# Altium PCB BEE_PC_ADT_V100.PcbDoc
Units mm, origin at the board's own origin, x right, y up, seen from the top; angles counter-clockwise.
Board outline 188 x 90 mm, 4 copper layers (L1_SHIELD, L2_GND, L3_POWER, L4_SHIELD), stack 1.584 mm thick; 22 components, 12 nets, 84 pads, 0 vias.
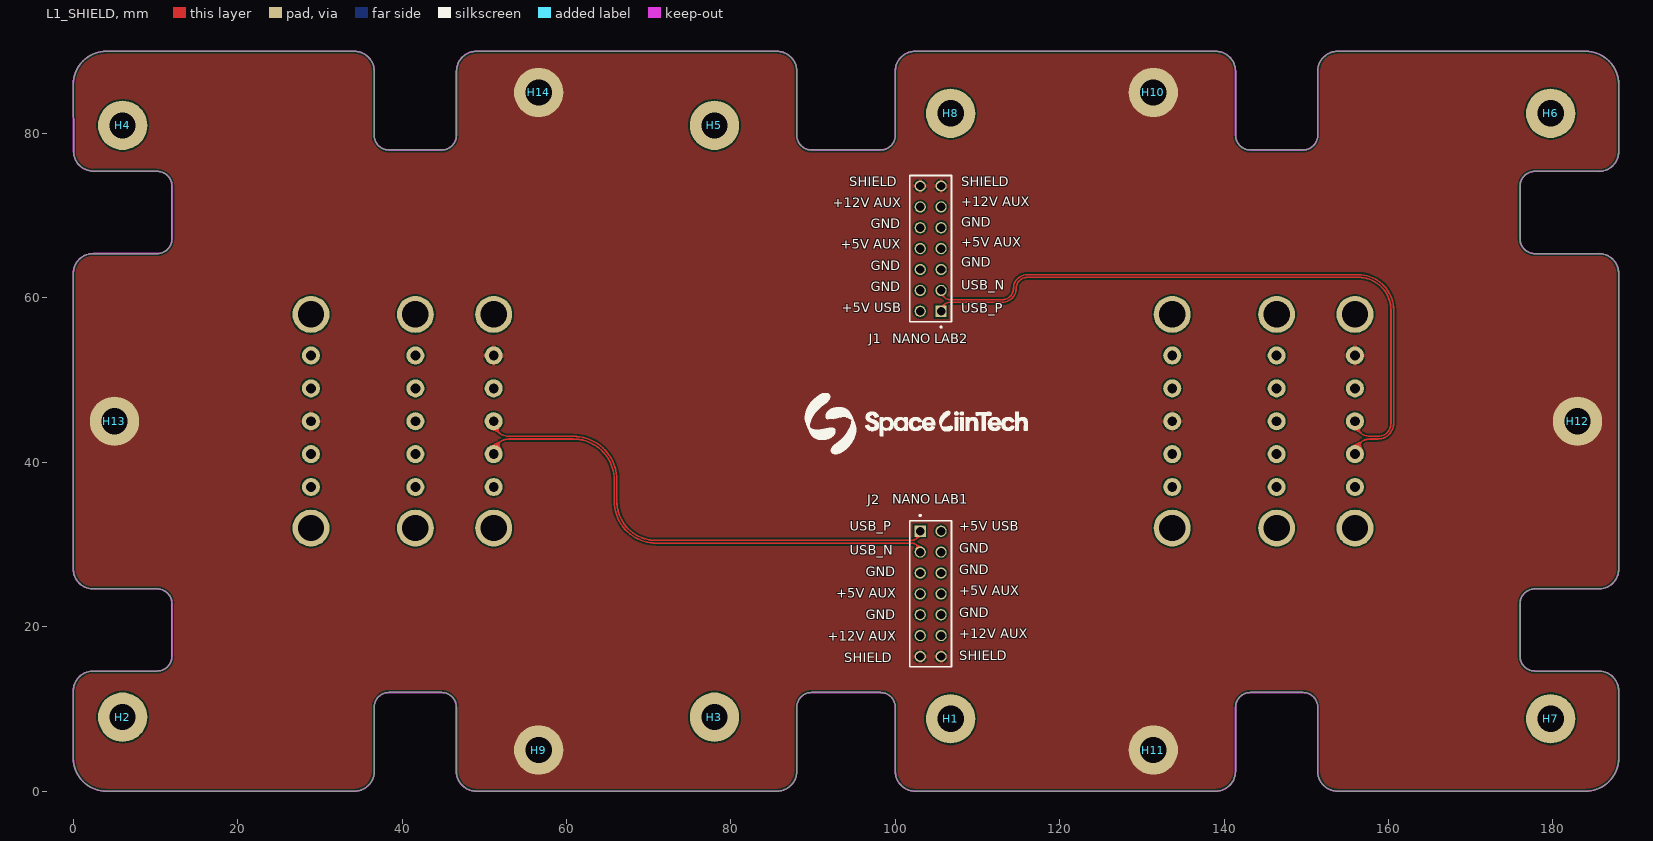
[diagram p0: L1_SHIELD view]
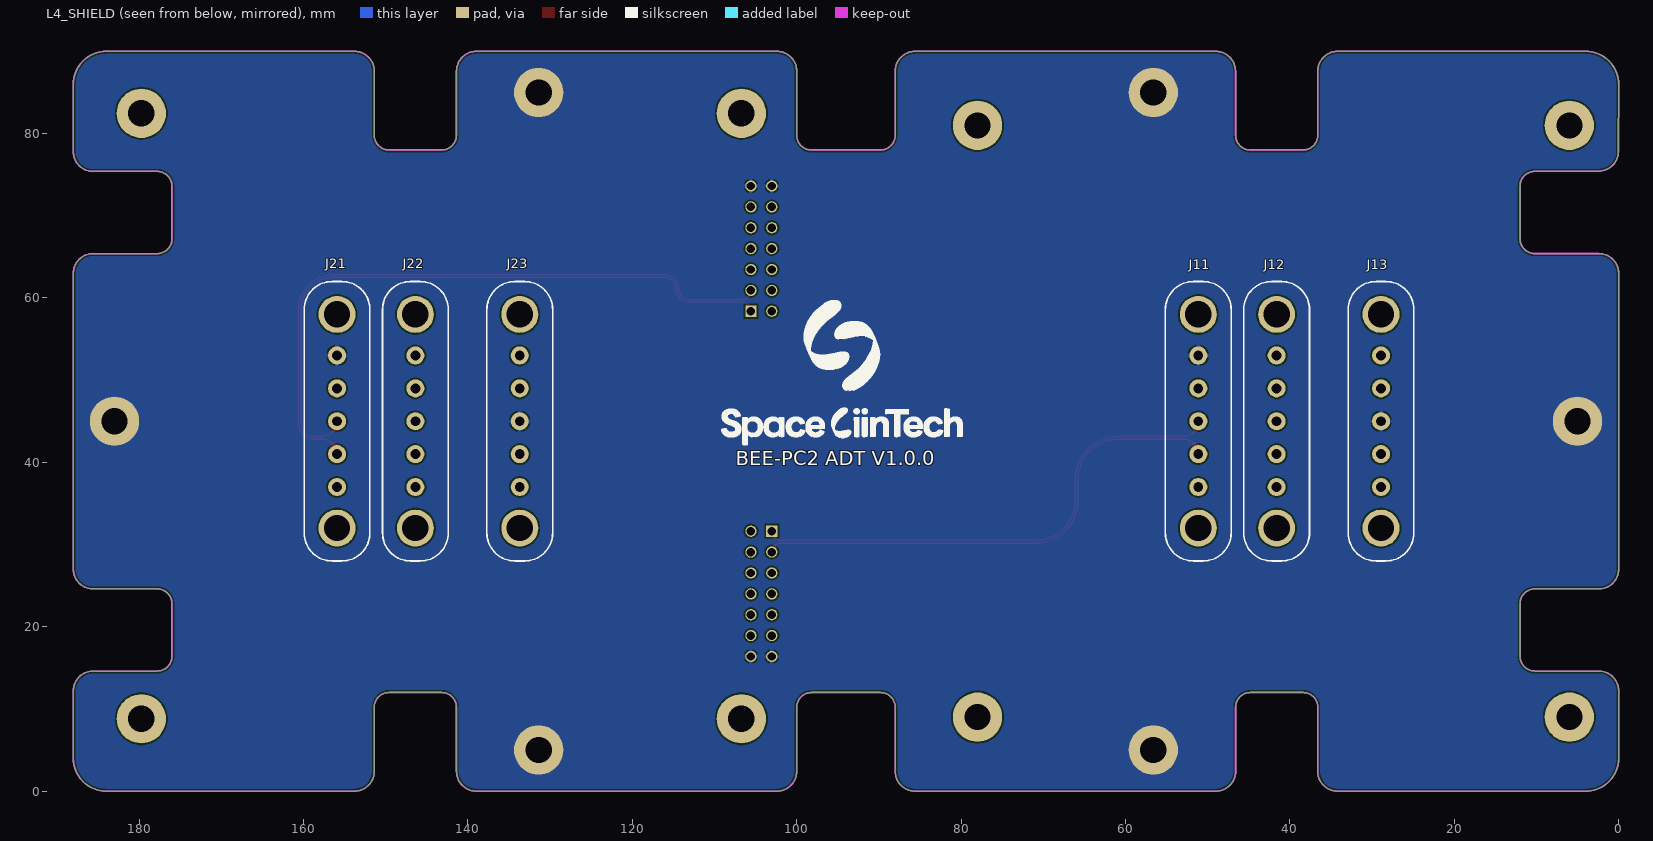
[diagram p1: L4_SHIELD view, seen from below]
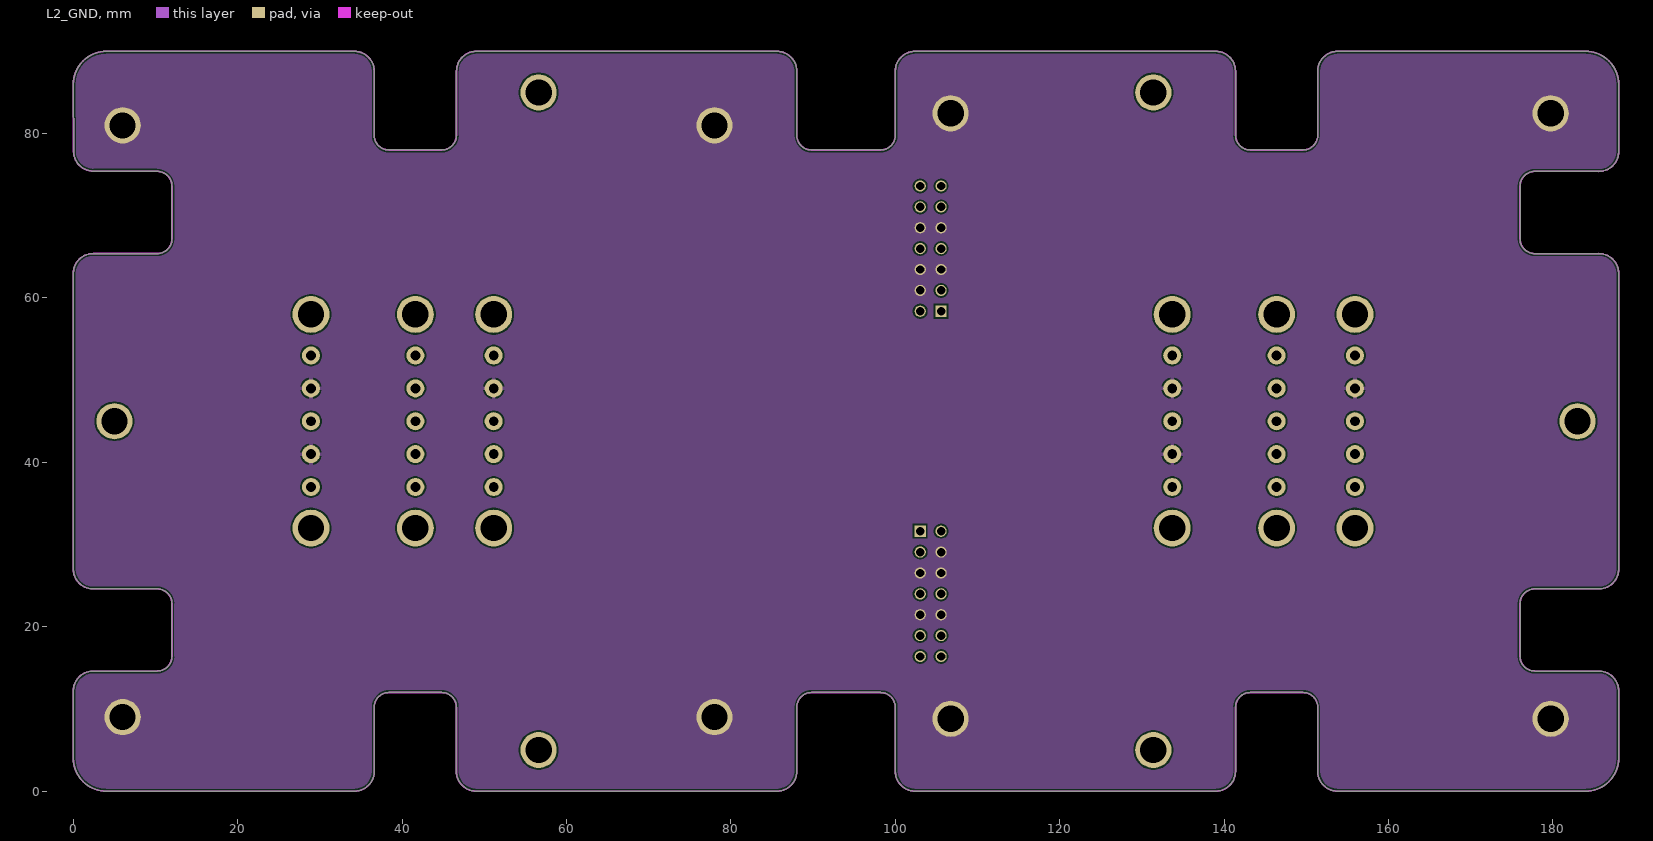
[diagram p2: L2_GND]
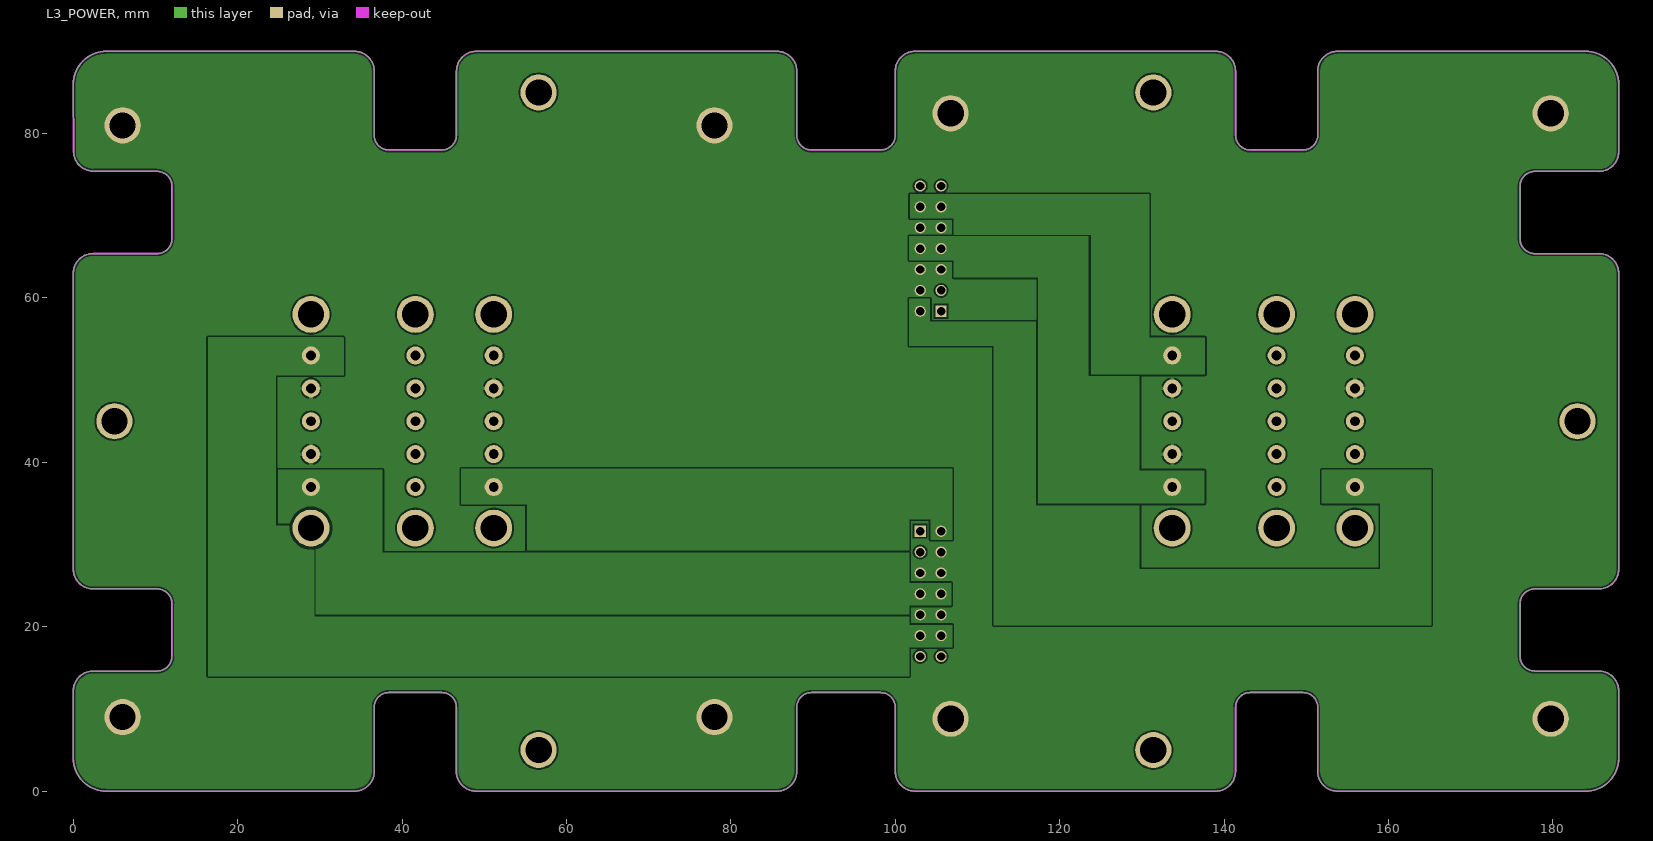
[diagram p3: L3_POWER]
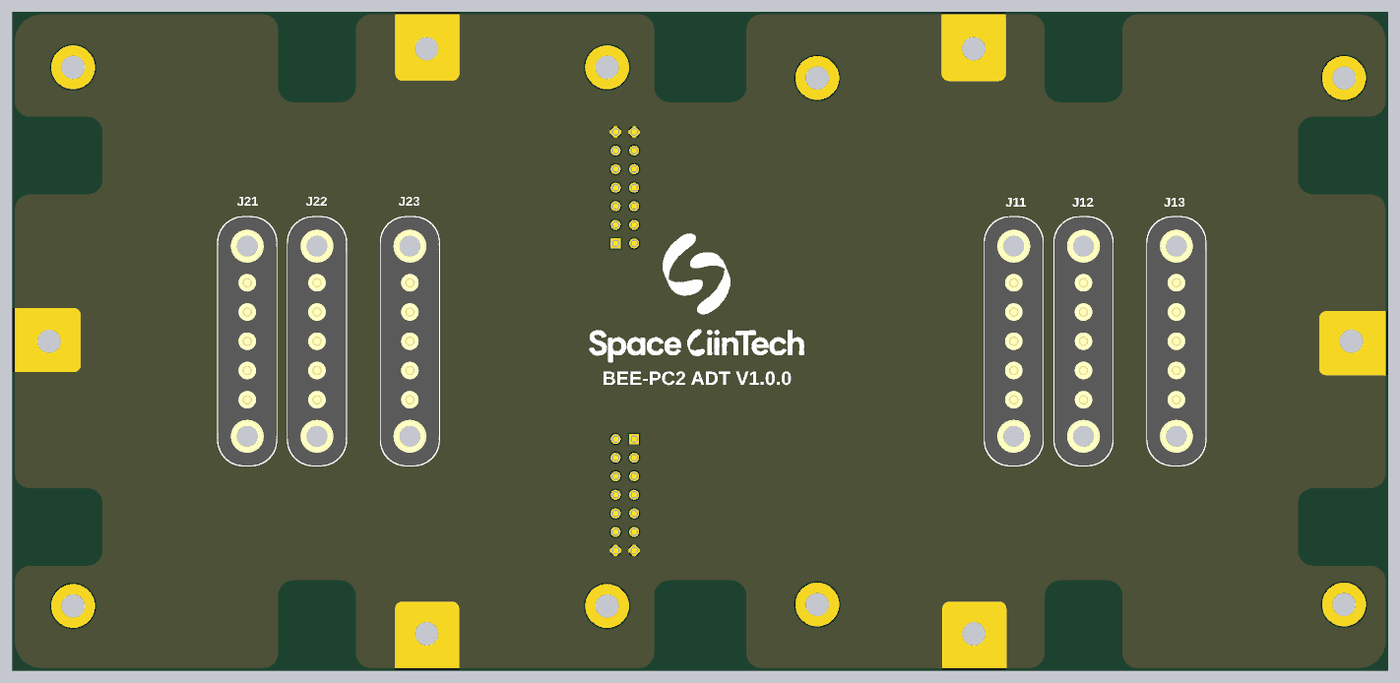
[diagram p4: 3D render of the assembled board from below, using the file's embedded part models]

## Layer stack, top to bottom
Top Solder: solder mask 0.012, Solder Resist, Dk 3.5
L1_SHIELD: signal copper 0.04
Dielectric 2: prepreg 0.2, FR-4, Dk 4.8
L2_GND: signal copper 0.032
Dielectric 3: core 1.04, FR-4, Dk 4.8
L3_POWER: signal copper 0.032
Dielectric 4: prepreg 0.2, FR-4, Dk 4.8
L4_SHIELD: signal copper 0.04
Bottom Solder: solder mask 0.012, Solder Resist, Dk 3.5

## Board outline
4,0 cw(c4,4) 0,4 0,12.2 cw(c2.4,12.2) 2.4,14.6 2.365,14.605 10.197,14.605 10.197,14.61 ccw(c10.197,16.41) 11.997,16.41 11.997,22.8 12,22.8 ccw(c10.2,22.8) 10.2,24.6 10.2,24.605 2.4,24.605 2.4,24.6 cw(c2.4,27) 0,27 0,63 cw(c2.4,63) 2.4,65.4 2.4,65.405 10.2,65.405 10.2,65.4 ccw(c10.2,67.2) 12,67.2 12,73.6 ccw(c10.2,73.6) 10.2,75.4 10.227,75.401 2.428,75.433 cw(c2.428,77.834) 0.026,77.834 0,86 cw(c4,86) 4,90 34.2,90 cw(c34.2,87.6) 36.6,87.6 36.6,79.8 ccw(c38.4,79.8) 38.4,78 44.81,78 ccw(c44.81,79.8) 46.61,79.8 46.609,79.8 46.609,87.659 46.61,87.6 cw(c49.01,87.6) 49.01,90 48.95,90 85.61,90 cw(c85.61,87.6) 88.01,87.6 88.011,87.599 88.011,79.8 88.01,79.8 ccw(c89.81,79.8) 89.81,78 98.2,78 ccw(c98.2,79.8) 100,79.8 100,87.6 cw(c102.4,87.6) 102.4,90 138.993,90 138.99,90 cw(c138.99,87.6) 141.39,87.6 141.39,87.603 141.39,79.8 ccw(c143.19,79.8) 143.19,78 149.59,78 ccw(c149.59,79.8) 151.39,79.8 151.39,87.6 cw(c153.79,87.6) 153.79,90 184,90 cw(c184,86) 188,86 188,77.79 cw(c185.6,77.79) 185.6,75.39 185.605,75.395 177.8,75.395 ccw(c177.8,73.595) 176,73.595 176,67.195 ccw(c177.8,67.195) 177.8,65.395 185.605,65.395 185.6,65.4 cw(c185.6,63) 188,63 188,27 cw(c185.6,27) 185.6,24.6 185.605,24.605 177.8,24.605 177.8,24.6 ccw(c177.8,22.8) 176,22.8 176,16.41 ccw(c177.8,16.41) 177.8,14.61 177.8,14.605 185.595,14.605 185.6,14.6 cw(c185.6,12.2) 188,12.2 188,4 cw(c184,4) 184,0 153.79,0 cw(c153.79,2.4) 151.39,2.4 151.39,10.2 ccw(c149.59,10.2) 149.59,12 143.19,12 ccw(c143.19,10.2) 141.39,10.2 141.39,2.4 cw(c138.99,2.4) 138.99,0 102.4,0 cw(c102.4,2.4) 100,2.4 100,10.19 ccw(c98.2,10.19) 98.2,11.99 98.2,12 89.81,12 ccw(c89.81,10.2) 88.01,10.2 88.011,10.2 88.011,2.441 88.01,2.4 cw(c85.61,2.4) 85.61,0 49,0 cw(c49,2.4) 46.6,2.4 46.609,2.331 46.609,10.2 46.6,10.2 ccw(c44.8,10.2) 44.8,12 38.4,12 ccw(c38.4,10.2) 36.6,10.2 36.6,2.38 36.61,2.4 cw(c34.21,2.4) 34.21,0 34.22,0

## Design rules (kind name [scope] priority, off if disabled: settings)
Clearance Clearance_Diff90 [InNetClass('Diff90_Class')] p1: gap=0.15 ignorepadtopadclearanceinfootprint=FALSE except(0.127: Arc-Arc Arc-Track Track-Track; 0.2: Arc-Poly Arc-Region Track-Poly Track-Region SMDPad-Poly SMDPad-Region THPad-Poly THPad-Region Via-Poly Via-Region Fill-Poly Fill-Region Poly-Poly Poly-Region Region-Region)
Clearance [All] p2: gap=0.15 ignorepadtopadclearanceinfootprint=FALSE except(0.2: Arc-Poly Arc-Region Track-Poly Track-Region SMDPad-Poly SMDPad-Region THPad-Poly THPad-Region Via-Poly Via-Region Fill-Poly Fill-Region Poly-Poly Poly-Region Region-Region)
DiffPairsRouting [InDifferentialPairClass('All Differential Pairs')] p1: maxlimit=0.254 minlimit=0.127 mostfreqgap=0.254 toplayer_maxgap=0.127 toplayer_prefgap=0.127 toplayer_minwidth=0.2 toplayer_maxwidth=0.2 toplayer_prefwidth=0.2 bottomlayer_maxgap=0.127 bottomlayer_prefgap=0.127 bottomlayer_minwidth=0.2 bottomlayer_maxwidth=0.2 bottomlayer_prefwidth=0.2 impedanceprofiledriven=TRUE impedanceprofileid={59139A54-4894-4927-A393-A3190D2A661B} impedanceprofilevalue=90.000000 maxuncoupledlength=12.7
HoleSize [All] p1: absolutevalues=TRUE maxlimit=6 minlimit=0.025 maxpercent=80.000 minpercent=20.000
HoleToHoleClearance [All] p1: gap=0.12 allowstackedmicrovias=TRUE
MinimumSolderMaskSliver [All] p1: minsoldermaskwidth=0.12
PolygonConnect [All] p1: thpad.connectstyle=Relief thpad.reliefconductorwidth=0.5 thpad.reliefentries=4 thpad.polygonreliefangle="90 Angle" thpad.airgapwidth=0.2 smdpad.connectstyle=Relief smdpad.reliefconductorwidth=0.5 smdpad.reliefentries=4 smdpad.polygonreliefangle="90 Angle" smdpad.airgapwidth=0.2 via.connectstyle=Direct via.reliefconductorwidth=0.5 via.reliefentries=4 via.polygonreliefangle="90 Angle" via.airgapwidth=0.2
RoutingVias [All] p1: holewidth=0.3 width=0.6 viastyle="Through Hole" minholewidth=0.3 minwidth=0.6 maxholewidth=0.3 maxwidth=0.6
SilkToSilkClearance [All] p1: silktosilkclearance=0.12
SilkToSolderMaskClearance [IsPad] p1: minsilkscreentomaskgap=0.12 clearancetoexposedcopper=TRUE
SolderMaskExpansion [All] p1: expansion=0.102 istentingtop=FALSE
Width [All] p1: maxlimit=1 minlimit=0.2 preferedwidth=0.5
24 further rules are at their usual default settings.

## Classes and differential pairs
net class Diff90_Class: NL1_USB_N NL1_USB_P NL2_USB_N NL2_USB_P
differential pair NL2_USB: +NL2_USB_P -NL2_USB_N
differential pair NL1_USB: +NL1_USB_P -NL1_USB_N

## Components (designator, comment, footprint, x,y, rotation, side; value= is the part's Value field where it differs from the comment)
H1 "M3" HEX-M3_NoVia#1 106.73,8.8 r0 top locked
H2 "M3" HEX-M3_NoVia#2 6,9 r0 top locked
H3 "M3" HEX-M3_NoVia#2 78,9 r0 top locked
H4 "M3" HEX-M3_NoVia#2 6,81 r0 top locked
H5 "M3" HEX-M3_NoVia#2 78,81 r0 top locked
H6 "M3" HEX-M3_NoVia#1 179.73,82.46 r0 top
H7 "M3" HEX-M3_NoVia#1 179.73,8.8 r0 top locked
H8 "M3" HEX-M3_NoVia#1 106.73,82.46 r0 top locked
H9 "M3" HEX-M3_NoVia#1 56.609,5 r0 top
H10 "M3" HEX-M3_NoVia#1 131.39,85 r0 top locked
H11 "M3" HEX-M3_NoVia#1 131.39,5 r0 top locked
H12 "M3" HEX-M3_NoVia#1 183,45 r0 top
H13 "M3" HEX-M3_NoVia#1 5,45 r0 top
H14 "M3" HEX-M3_NoVia#1 56.609,85 r0 top locked
J1 "Header 7x2_Z" SAMTEC_TSW-107-07-F-D 104.3,66 r90 top locked
J2 "Header 7x2_Z" SAMTEC_TSW-107-07-F-D 104.3,24 r270 top locked
J11 "858-22-005-10-011101" Mill-Max_858-22-005-10-011101 51.14,45 r90 bottom locked
J12 "858-22-005-10-011101" Mill-Max_858-22-005-10-011101 41.61,45 r270 bottom locked
J13 "858-22-005-10-011101" Mill-Max_858-22-005-10-011101 28.91,45 r90 bottom locked
J21 "858-22-005-10-011101" Mill-Max_858-22-005-10-011101 155.92,45 r90 bottom locked
J22 "858-22-005-10-011101" Mill-Max_858-22-005-10-011101 146.39,45 r270 bottom locked
J23 "858-22-005-10-011101" Mill-Max_858-22-005-10-011101 133.69,45 r90 bottom locked

## Footprints (in the part's own frame and the unit in brackets; to place one, negate y for a bottom-side part, rotate by r counter-clockwise, add the part's x,y. Pads: shape width x height; smd on the part's side, far side on the other; paste and mask are expansions set on the pad)
HEX-M3_NoVia#1 [mm]
  round 6 / inner round 4.4 / far side round 6 hole 3.2: 1(0,0)
HEX-M3_NoVia#2 [mm]
  round 6 / inner round 4.4 / far side round 6 hole 3.18: 1(0,0)
Mill-Max_858-22-005-10-011101 [mm] "CONN SPRING PISTON 5POS PCB"
  round 2.2 hole 1.2: 1(-8,0) 2(-4,0) 3(0,0) 4(4,0) 5(8,0)
  round 4.5 hole 3.2: M1(-13,0) M2(13,0)
  silkscreen extent -17,-4 17,4, body extent -17,-4 17,4, height 9.6
SAMTEC_TSW-107-07-F-D [mm]
  rect 1.37x1.37 hole 1.02: 1(-7.62,-1.27)
  round 1.37 hole 1.02: 2(-7.62,1.27) 3(-5.08,-1.27) 4(-5.08,1.27) 5(-2.54,-1.27) 6(-2.54,1.27) 7(0,-1.27) 8(0,1.27) 9(2.54,-1.27) 10(2.54,1.27) 11(5.08,-1.27) 12(5.08,1.27) 13(7.62,-1.27) 14(7.62,1.27)
  silkscreen extent -9.64,-2.54 8.89,2.54, body extent -8.89,-2.54 8.89,2.54, height 8.38

## Part data
H1 H2 H3 H4 H5 H6 H7 H8 H9 H10 H11 H12 H13 H14: library part HEX-M3
J11 J12 J13 J21 J22 J23: library part "Header 5x1_2M"

## Nets (pads, with @x,y where several pads share a name; then routed paths per layer and width w, separated by ;. In a path a pad name is that pad's centre, name@x,y a point inside that pad or via, vN(x,y) a via of type N, cw(c..) or ccw(c..) an arc to the next point about the centre after c; other vN are vias at no path point)
+5V_AUX_NL1: J2.7 J2.8 J13.1
+5V_AUX_NL2: J1.7 J1.8 J23.1
+5V_USB_NL1: J2.2 J11.1
+5V_USB_NL2: J1.2 J21.1
+12V_AUX_NL1: J2.11 J2.12 J13.5
+12V_AUX_NL2: J1.11 J1.12 J23.5
GND: H1.1 H2.1 H3.1 H4.1 H5.1 H6.1 H7.1 H8.1 J1.4 J1.5 J1.6 J1.9 J1.10 J2.4 J2.5 J2.6 J2.9 J2.10 J11.4 J13.2 J13.4 J21.4 J23.2 J23.4
NL1_USB_N: J2.3 J11.2 | length 61.9
  L1_SHIELD w0.2: J11.2 cw(c52.977,41) 52.977,42.837 60.816,42.837 cw(c60.816,37.852) 65.8,37.852 65.8,35.269 ccw(c70.896,35.269) 70.896,30.173 101.937,30.173 cw(c101.937,29.08) J2.3
NL1_USB_P: J2.1 J11.3 | length 61.9
  L1_SHIELD w0.2: J11.3 ccw(c52.976,45) 52.976,43.164 60.816,43.164 cw(c60.816,37.852) 66.127,37.852 66.127,35.269 ccw(c70.896,35.269) 70.896,30.5 101.91,30.5 ccw(c101.91,31.62) J2.1
NL2_USB_N: J1.3 J21.2 | length 80.5
  L1_SHIELD w0.2: J1.3 ccw(c106.69,60.92) 106.69,59.8 113.019,59.8 ccw(c113.019,61.154) 114.373,61.154 cw(c116.046,61.154) 116.046,62.827 156.326,62.827 cw(c156.326,58.526) 160.627,58.526 160.627,44.738 cw(c158.726,44.738) 158.726,42.837 157.757,42.837 ccw(c157.757,41) J21.2
NL2_USB_P: J1.1 J21.3 | length 79.5
  L1_SHIELD w0.2: J1.1 cw(c106.663,58.38) 106.663,59.473 113.019,59.473 ccw(c113.019,61.154) 114.7,61.154 cw(c116.046,61.154) 116.046,62.5 156.326,62.5 cw(c156.326,58.526) 160.3,58.526 160.3,44.738 cw(c158.726,44.738) 158.726,43.164 157.756,43.164 cw(c157.756,45) J21.3
SHIELD: H9.1 H10.1 H11.1 H12.1 H13.1 H14.1 J1.13 J1.14 J2.13 J2.14 J11.5 J13.3 J21.5 J23.3
pads on no net: J11.M1 J11.M2 J12.1 J12.2 J12.3 J12.4 J12.5 J12.M1 J12.M2 J13.M1 J13.M2 J21.M1 J21.M2 J22.1 J22.2 J22.3 J22.4 J22.5 J22.M1 J22.M2 J23.M1 J23.M2

## Polygon pours and split planes (outlines as drawn)
+5V_USB_NL2 on L3_POWER "NONET_L-01_P-001" (solid, pour order 5): 101.7,59.9 104.2,59.9 104.2,57.1 117.09,57.1 117.09,34.689 129.7,34.689 129.7,27 159,27 159,35 151.9,35 151.9,39.1 165.2,39.1 165.2,20.2 112,20.2 112,54.2 101.7,54.2
+5V_AUX_NL1 on L3_POWER "NONET_L-01_P-001" (solid, pour order 1): 24.9,32.6 29.52,32.6 29.52,21.49 101.7,21.49 101.7,22.6 106.8,22.6 106.8,25.3 101.7,25.3 101.7,29 37.6,29 37.6,39.1 24.9,39.1
+5V_USB_NL1 on L3_POWER "NONET_L-01_P-001" (solid, pour order 0): 104.3,33.096 104.3,30.6 106.9,30.6 106.9,39.2 47.2,39.2 47.2,34.9 55.2,34.9 55.2,29.3 101.7,29.3 101.7,33.096
+12V_AUX_NL1 on L3_POWER "NONET_L-01_P-001" (solid, pour order 2): 24.6,32.3 29.3,32.3 29.3,21.2 101.7,21.2 101.7,20.2 106.9,20.2 106.9,17.5 101.7,17.5 101.7,14 16.4,14 16.4,55.188 32.9,55.2 32.9,50.6 24.6,50.6
+12V_AUX_NL2 on L3_POWER "NONET_L-01_P-001" (solid, pour order 3): 107.1,69.7 107.1,67.7 123.83,67.7 123.83,50.7 137.671,50.7 137.671,55.167 130.9,55.167 130.9,72.6 101.8,72.6 101.8,69.7
+5V_AUX_NL2 on L3_POWER "NONET_L-01_P-001" (solid, pour order 4): 101.7,67.5 123.49,67.5 123.49,50.45 129.7,50.45 129.7,39 137.6,39 137.6,35 117.4,35 117.4,62.5 107.1,62.5 107.1,64.6 101.7,64.6
GND on L3_POWER "GND_L03_P008" (solid, remove dead copper, pour order 8): 4,0 cw(c4,4) 0,4 0,12.2 cw(c2.4,12.2) 2.4,14.6 2.365,14.605 10.197,14.605 10.197,14.61 ccw(c10.197,16.41) 11.997,16.41 11.997,22.8 12,22.8 ccw(c10.2,22.8) 10.2,24.6 10.2,24.605 2.4,24.605 2.4,24.6 cw(c2.4,27) 0,27 0,63 cw(c2.4,63) 2.4,65.4 2.4,65.405 10.2,65.405 10.2,65.4 ccw(c10.2,67.2) 12,67.2 12,73.6 ccw(c10.2,73.6) 10.2,75.4 10.227,75.401 2.428,75.433 cw(c2.428,77.834) 0.026,77.834 0,86 cw(c4,86) 4,90 34.2,90 cw(c34.2,87.6) 36.6,87.6 36.6,79.8 ccw(c38.4,79.8) 38.4,78 44.81,78 ccw(c44.81,79.8) 46.61,79.8 46.609,79.8 46.609,87.659 46.61,87.6 cw(c49.01,87.6) 49.01,90 48.95,90 85.61,90 cw(c85.61,87.6) 88.01,87.6 88.011,87.599 88.011,79.8 88.01,79.8 ccw(c89.81,79.8) 89.81,78 98.2,78 ccw(c98.2,79.8) 100,79.8 100,87.6 cw(c102.4,87.6) 102.4,90 138.993,90 138.99,90 cw(c138.99,87.6) 141.39,87.6 141.39,87.603 141.39,79.8 ccw(c143.19,79.8) 143.19,78 149.59,78 ccw(c149.59,79.8) 151.39,79.8 151.39,87.6 cw(c153.79,87.6) 153.79,90 184,90 cw(c184,86) 188,86 188,77.79 cw(c185.6,77.79) 185.6,75.39 185.605,75.395 177.8,75.395 ccw(c177.8,73.595) 176,73.595 176,67.195 ccw(c177.8,67.195) 177.8,65.395 185.605,65.395 185.6,65.4 cw(c185.6,63) 188,63 188,27 cw(c185.6,27) 185.6,24.6 185.605,24.605 177.8,24.605 177.8,24.6 ccw(c177.8,22.8) 176,22.8 176,16.41 ccw(c177.8,16.41) 177.8,14.61 177.8,14.605 185.595,14.605 185.6,14.6 cw(c185.6,12.2) 188,12.2 188,4 cw(c184,4) 184,0 153.79,0 cw(c153.79,2.4) 151.39,2.4 151.39,10.2 ccw(c149.59,10.2) 149.59,12 143.19,12 ccw(c143.19,10.2) 141.39,10.2 141.39,2.4 cw(c138.99,2.4) 138.99,0 102.4,0 cw(c102.4,2.4) 100,2.4 100,10.19 ccw(c98.2,10.19) 98.2,11.99 98.2,12 89.81,12 ccw(c89.81,10.2) 88.01,10.2 88.011,10.2 88.011,2.441 88.01,2.4 cw(c85.61,2.4) 85.61,0 49,0 cw(c49,2.4) 46.6,2.4 46.609,2.331 46.609,10.2 46.6,10.2 ccw(c44.8,10.2) 44.8,12 38.4,12 ccw(c38.4,10.2) 36.6,10.2 36.6,2.38 36.61,2.4 cw(c34.21,2.4) 34.21,0 34.22,0
GND on L2_GND "GND_L02_P006" (solid, remove dead copper, pour order 6): 4,0 cw(c4,4) 0,4 0,12.2 cw(c2.4,12.2) 2.4,14.6 2.365,14.605 10.197,14.605 10.197,14.61 ccw(c10.197,16.41) 11.997,16.41 11.997,22.8 12,22.8 ccw(c10.2,22.8) 10.2,24.6 10.2,24.605 2.4,24.605 2.4,24.6 cw(c2.4,27) 0,27 0,63 cw(c2.4,63) 2.4,65.4 2.4,65.405 10.2,65.405 10.2,65.4 ccw(c10.2,67.2) 12,67.2 12,73.6 ccw(c10.2,73.6) 10.2,75.4 10.227,75.401 2.428,75.433 cw(c2.428,77.834) 0.026,77.834 0,86 cw(c4,86) 4,90 34.2,90 cw(c34.2,87.6) 36.6,87.6 36.6,79.8 ccw(c38.4,79.8) 38.4,78 44.81,78 ccw(c44.81,79.8) 46.61,79.8 46.609,79.8 46.609,87.659 46.61,87.6 cw(c49.01,87.6) 49.01,90 48.95,90 85.61,90 cw(c85.61,87.6) 88.01,87.6 88.011,87.599 88.011,79.8 88.01,79.8 ccw(c89.81,79.8) 89.81,78 98.2,78 ccw(c98.2,79.8) 100,79.8 100,87.6 cw(c102.4,87.6) 102.4,90 138.993,90 138.99,90 cw(c138.99,87.6) 141.39,87.6 141.39,87.603 141.39,79.8 ccw(c143.19,79.8) 143.19,78 149.59,78 ccw(c149.59,79.8) 151.39,79.8 151.39,87.6 cw(c153.79,87.6) 153.79,90 184,90 cw(c184,86) 188,86 188,77.79 cw(c185.6,77.79) 185.6,75.39 185.605,75.395 177.8,75.395 ccw(c177.8,73.595) 176,73.595 176,67.195 ccw(c177.8,67.195) 177.8,65.395 185.605,65.395 185.6,65.4 cw(c185.6,63) 188,63 188,27 cw(c185.6,27) 185.6,24.6 185.605,24.605 177.8,24.605 177.8,24.6 ccw(c177.8,22.8) 176,22.8 176,16.41 ccw(c177.8,16.41) 177.8,14.61 177.8,14.605 185.595,14.605 185.6,14.6 cw(c185.6,12.2) 188,12.2 188,4 cw(c184,4) 184,0 153.79,0 cw(c153.79,2.4) 151.39,2.4 151.39,10.2 ccw(c149.59,10.2) 149.59,12 143.19,12 ccw(c143.19,10.2) 141.39,10.2 141.39,2.4 cw(c138.99,2.4) 138.99,0 102.4,0 cw(c102.4,2.4) 100,2.4 100,10.19 ccw(c98.2,10.19) 98.2,11.99 98.2,12 89.81,12 ccw(c89.81,10.2) 88.01,10.2 88.011,10.2 88.011,2.441 88.01,2.4 cw(c85.61,2.4) 85.61,0 49,0 cw(c49,2.4) 46.6,2.4 46.609,2.331 46.609,10.2 46.6,10.2 ccw(c44.8,10.2) 44.8,12 38.4,12 ccw(c38.4,10.2) 36.6,10.2 36.6,2.38 36.61,2.4 cw(c34.21,2.4) 34.21,0 34.22,0
SHIELD on L4_SHIELD "SHIELD_L04_P009" (solid, remove dead copper, pour order 9): 4,0 cw(c4,4) 0,4 0,12.2 cw(c2.4,12.2) 2.4,14.6 2.365,14.605 10.197,14.605 10.197,14.61 ccw(c10.197,16.41) 11.997,16.41 11.997,22.8 12,22.8 ccw(c10.2,22.8) 10.2,24.6 10.2,24.605 2.4,24.605 2.4,24.6 cw(c2.4,27) 0,27 0,63 cw(c2.4,63) 2.4,65.4 2.4,65.405 10.2,65.405 10.2,65.4 ccw(c10.2,67.2) 12,67.2 12,73.6 ccw(c10.2,73.6) 10.2,75.4 10.227,75.401 2.428,75.433 cw(c2.428,77.834) 0.026,77.834 0,86 cw(c4,86) 4,90 34.2,90 cw(c34.2,87.6) 36.6,87.6 36.6,79.8 ccw(c38.4,79.8) 38.4,78 44.81,78 ccw(c44.81,79.8) 46.61,79.8 46.609,79.8 46.609,87.659 46.61,87.6 cw(c49.01,87.6) 49.01,90 48.95,90 85.61,90 cw(c85.61,87.6) 88.01,87.6 88.011,87.599 88.011,79.8 88.01,79.8 ccw(c89.81,79.8) 89.81,78 98.2,78 ccw(c98.2,79.8) 100,79.8 100,87.6 cw(c102.4,87.6) 102.4,90 138.993,90 138.99,90 cw(c138.99,87.6) 141.39,87.6 141.39,87.603 141.39,79.8 ccw(c143.19,79.8) 143.19,78 149.59,78 ccw(c149.59,79.8) 151.39,79.8 151.39,87.6 cw(c153.79,87.6) 153.79,90 184,90 cw(c184,86) 188,86 188,77.79 cw(c185.6,77.79) 185.6,75.39 185.605,75.395 177.8,75.395 ccw(c177.8,73.595) 176,73.595 176,67.195 ccw(c177.8,67.195) 177.8,65.395 185.605,65.395 185.6,65.4 cw(c185.6,63) 188,63 188,27 cw(c185.6,27) 185.6,24.6 185.605,24.605 177.8,24.605 177.8,24.6 ccw(c177.8,22.8) 176,22.8 176,16.41 ccw(c177.8,16.41) 177.8,14.61 177.8,14.605 185.595,14.605 185.6,14.6 cw(c185.6,12.2) 188,12.2 188,4 cw(c184,4) 184,0 153.79,0 cw(c153.79,2.4) 151.39,2.4 151.39,10.2 ccw(c149.59,10.2) 149.59,12 143.19,12 ccw(c143.19,10.2) 141.39,10.2 141.39,2.4 cw(c138.99,2.4) 138.99,0 102.4,0 cw(c102.4,2.4) 100,2.4 100,10.19 ccw(c98.2,10.19) 98.2,11.99 98.2,12 89.81,12 ccw(c89.81,10.2) 88.01,10.2 88.011,10.2 88.011,2.441 88.01,2.4 cw(c85.61,2.4) 85.61,0 49,0 cw(c49,2.4) 46.6,2.4 46.609,2.331 46.609,10.2 46.6,10.2 ccw(c44.8,10.2) 44.8,12 38.4,12 ccw(c38.4,10.2) 36.6,10.2 36.6,2.38 36.61,2.4 cw(c34.21,2.4) 34.21,0 34.22,0
SHIELD on L1_SHIELD "SHIELD_L01_P010" (solid, pour order 10): 4,0 cw(c4,4) 0,4 0,12.2 cw(c2.4,12.2) 2.4,14.6 2.365,14.605 10.197,14.605 10.197,14.61 ccw(c10.197,16.41) 11.997,16.41 11.997,22.8 12,22.8 ccw(c10.2,22.8) 10.2,24.6 10.2,24.605 2.4,24.605 2.4,24.6 cw(c2.4,27) 0,27 0,63 cw(c2.4,63) 2.4,65.4 2.4,65.405 10.2,65.405 10.2,65.4 ccw(c10.2,67.2) 12,67.2 12,73.6 ccw(c10.2,73.6) 10.2,75.4 10.227,75.401 2.428,75.433 cw(c2.428,77.834) 0.026,77.834 0,86 cw(c4,86) 4,90 34.2,90 cw(c34.2,87.6) 36.6,87.6 36.6,79.8 ccw(c38.4,79.8) 38.4,78 44.81,78 ccw(c44.81,79.8) 46.61,79.8 46.609,79.8 46.609,87.659 46.61,87.6 cw(c49.01,87.6) 49.01,90 48.95,90 85.61,90 cw(c85.61,87.6) 88.01,87.6 88.011,87.599 88.011,79.8 88.01,79.8 ccw(c89.81,79.8) 89.81,78 98.2,78 ccw(c98.2,79.8) 100,79.8 100,87.6 cw(c102.4,87.6) 102.4,90 138.993,90 138.99,90 cw(c138.99,87.6) 141.39,87.6 141.39,87.603 141.39,79.8 ccw(c143.19,79.8) 143.19,78 149.59,78 ccw(c149.59,79.8) 151.39,79.8 151.39,87.6 cw(c153.79,87.6) 153.79,90 184,90 cw(c184,86) 188,86 188,77.79 cw(c185.6,77.79) 185.6,75.39 185.605,75.395 177.8,75.395 ccw(c177.8,73.595) 176,73.595 176,67.195 ccw(c177.8,67.195) 177.8,65.395 185.605,65.395 185.6,65.4 cw(c185.6,63) 188,63 188,27 cw(c185.6,27) 185.6,24.6 185.605,24.605 177.8,24.605 177.8,24.6 ccw(c177.8,22.8) 176,22.8 176,16.41 ccw(c177.8,16.41) 177.8,14.61 177.8,14.605 185.595,14.605 185.6,14.6 cw(c185.6,12.2) 188,12.2 188,4 cw(c184,4) 184,0 153.79,0 cw(c153.79,2.4) 151.39,2.4 151.39,10.2 ccw(c149.59,10.2) 149.59,12 143.19,12 ccw(c143.19,10.2) 141.39,10.2 141.39,2.4 cw(c138.99,2.4) 138.99,0 102.4,0 cw(c102.4,2.4) 100,2.4 100,10.19 ccw(c98.2,10.19) 98.2,11.99 98.2,12 89.81,12 ccw(c89.81,10.2) 88.01,10.2 88.011,10.2 88.011,2.441 88.01,2.4 cw(c85.61,2.4) 85.61,0 49,0 cw(c49,2.4) 46.6,2.4 46.609,2.331 46.609,10.2 46.6,10.2 ccw(c44.8,10.2) 44.8,12 38.4,12 ccw(c38.4,10.2) 36.6,10.2 36.6,2.38 36.61,2.4 cw(c34.21,2.4) 34.21,0 34.22,0

## Keep-outs
Keep-Out Layer:
  lines w0.2: 0,12.2 cw(c2.4,12.2) 2.4,14.6 ; 0,12.24 0,4 ccw(c4,4) 4,0 31.561,0 34.22,0 ; 2.365,14.605 10.197,14.605 ; 2.4,24.6 cw(c2.4,27) 0,27 0,52.197 0,63 cw(c2.4,63) 2.4,65.4 ; 2.4,24.605 10.2,24.605 ; 2.4,65.405 10.2,65.405 ; 10.197,14.61 ccw(c10.197,16.41) 11.997,16.41 11.997,22.8 12,22.8 ccw(c10.2,22.8) 10.2,24.6 ; 10.2,65.4 ccw(c10.2,67.2) 12,67.2 12,73.6 ccw(c10.2,73.6) 10.2,75.4 ; 10.227,75.401 2.428,75.433 cw(c2.428,77.834) 0.026,77.834 0,86 cw(c4,86) 4,90 34.2,90 cw(c34.2,87.6) 36.6,87.6 36.6,79.8 ccw(c38.4,79.8) 38.4,78 44.81,78 ccw(c44.81,79.8) 46.61,79.8 ; 34.21,0 ccw(c34.21,2.4) 36.61,2.4 ; 36.6,2.38 36.6,10.2 cw(c38.4,10.2) 38.4,12 44.8,12 cw(c44.8,10.2) 46.6,10.2 ; 46.6,2.4 ccw(c49,2.4) 49,0 ; 46.609,2.331 46.609,10.2 ; 46.609,79.8 46.609,87.659 ; 46.61,87.6 cw(c49.01,87.6) 49.01,90 ; 48.94,0 85.57,0 ; 48.95,90 85.61,90 cw(c85.61,87.6) 88.01,87.6 ; 85.61,0 ccw(c85.61,2.4) 88.01,2.4 ; 88.01,10.2 cw(c89.81,10.2) 89.81,12 98.2,12 ; 88.01,79.8 ccw(c89.81,79.8) 89.81,78 98.2,78 ccw(c98.2,79.8) 100,79.8 100,87.6 cw(c102.4,87.6) 102.4,90 138.993,90 ; 88.011,2.441 88.011,10.2 ; 88.011,79.8 88.011,87.599 ; 98.2,11.99 cw(c98.2,10.19) 100,10.19 100,2.38 ; 100,2.4 ccw(c102.4,2.4) 102.4,0 ; 102.38,0 103.544,0 138.99,0 ccw(c138.99,2.4) 141.39,2.4 141.39,10.2 cw(c143.19,10.2) 143.19,12 149.6,12 ; 138.99,90 cw(c138.99,87.6) 141.39,87.6 ; 141.39,87.603 141.39,79.8 ccw(c143.19,79.8) 143.19,78 149.59,78 ccw(c149.59,79.8) 151.39,79.8 151.39,87.6 cw(c153.79,87.6) 153.79,90 184,90 cw(c184,86) 188,86 188,77.79 cw(c185.6,77.79) 185.6,75.39 ; 149.59,12 cw(c149.59,10.2) 151.39,10.2 151.39,2.4 ccw(c153.79,2.4) 153.79,0 184,0 ccw(c184,4) 188,4 188,12.2 ccw(c185.6,12.2) 185.6,14.6 ; 177.8,14.605 185.595,14.605 ; 177.8,14.61 cw(c177.8,16.41) 176,16.41 176,22.8 ; 177.8,24.6 ccw(c177.8,22.8) 176,22.8 ; 177.8,24.605 185.605,24.605 ; 185.6,24.6 ccw(c185.6,27) 188,27 188,63 ccw(c185.6,63) 185.6,65.4 ; 185.605,65.395 177.8,65.395 cw(c177.8,67.195) 176,67.195 ; 185.605,75.395 177.8,75.395 ccw(c177.8,73.595) 176,73.595 ; 176,22.8 176,22.8 ; 176,67.195 176,73.595 ; 176,67.195 176,67.195 ; 176,73.595 176,73.595

## Other copper
L3_POWER:
  pour cut-out: 28.91,29.367 cw(c28.91,32) 26.277,32 cw(c28.91,32) 28.91,34.633 cw(c28.91,32) 31.543,32 cw(c28.91,32)

## Silkscreen, mask and mechanical layers (free items; w line width, h text height)
Top Overlay:
  drawing of 17 lines, arcs and shapes, not listed
  text "SHIELD" at 94.4,73.16 h2
  text "SHIELD" at 108,73.158 h2
  text "+12V AUX" at 108,70.711 h2
  text "+12V AUX" at 92.383,70.62 h2
  text "GND" at 108,68.248 h2
  text "GND" at 97.006,68.064 h2
  text "+5V AUX" at 108,65.807 h2
  text "+5V AUX" at 93.378,65.53 h2
  text "GND" at 108,63.344 h2
  text "GND" at 97.006,62.973 h2
  text "USB_N" at 108,60.549 h2
  text "GND" at 97.006,60.417 h2
  text "+5V USB" at 93.462,57.86 h2
  text "USB_P" at 108,57.754 h2
  text "NANO LAB2" at 99.6,54.091 h2
  text "NANO LAB1" at 99.6,34.522 h2
  text "USB_P" at 94.47,31.274 h2
  text "+5V USB" at 107.8,31.222 h2
  text "GND" at 107.8,28.599 h2
  text "USB_N" at 94.433,28.319 h2
  text "GND" at 107.8,25.976 h2
  text "GND" at 96.423,25.696 h2
  text "+5V AUX" at 107.8,23.375 h2
  text "+5V AUX" at 92.795,23.095 h2
  text "GND" at 107.8,20.752 h2
  text "GND" at 96.423,20.472 h2
  text "+12V AUX" at 107.8,18.145 h2
  text "+12V AUX" at 91.8,17.865 h2
  text "SHIELD" at 107.8,15.522 h2
  text "SHIELD" at 93.817,15.242 h2
Bottom Overlay:
  drawing of 17 lines, arcs and shapes, not listed
  text "BEE-PC2 ADT V1.0.0" at 107.4,39.033 h3
Top Solder:
  region: 9.4,41.355 cw(c8.4,41.355) 8.4,40.355 0,40.355 0,49.125 8.4,49.125 cw(c8.4,48.125) 9.4,48.125
  region: 59.925,9.4 cw(c59.925,8.4) 60.925,8.4 60.925,0 52.155,0 52.155,8.4 cw(c53.155,8.4) 53.155,9.4
  region: 134.735,9.4 cw(c134.735,8.4) 135.735,8.4 135.735,0 126.965,0 126.965,8.4 cw(c127.965,8.4) 127.965,9.4
  region: 178.586,48.555 cw(c179.586,48.555) 179.586,49.555 187.986,49.555 187.986,40.785 179.586,40.785 cw(c179.586,41.785) 178.586,41.785
  region: 127.935,80.636 cw(c127.935,81.636) 126.935,81.636 126.935,90.036 135.705,90.036 135.705,81.636 cw(c134.705,81.636) 134.705,80.636
  region: 53.225,80.586 cw(c53.225,81.586) 52.225,81.586 52.225,89.986 60.995,89.986 60.995,81.586 cw(c59.995,81.586) 59.995,80.586
Bottom Solder:
  region: 53.225,80.592 cw(c53.225,81.592) 52.225,81.592 52.225,89.992 60.995,89.992 60.995,81.592 cw(c59.995,81.592) 59.995,80.592
  region: 127.925,80.632 cw(c127.925,81.632) 126.925,81.632 126.925,90.032 135.695,90.032 135.695,81.632 cw(c134.695,81.632) 134.695,80.632
  region: 178.676,48.551 cw(c179.676,48.551) 179.676,49.551 188.076,49.551 188.076,40.781 179.676,40.781 cw(c179.676,41.781) 178.676,41.781
  region: 134.725,9.4 cw(c134.725,8.4) 135.725,8.4 135.725,0 126.955,0 126.955,8.4 cw(c127.955,8.4) 127.955,9.4
  region: 59.915,9.4 cw(c59.915,8.4) 60.915,8.4 60.915,0 52.145,0 52.145,8.4 cw(c53.145,8.4) 53.145,9.4
  region: 9.4,41.351 cw(c8.4,41.351) 8.4,40.351 0,40.351 0,49.121 8.4,49.121 cw(c8.4,48.121) 9.4,48.121